# Altium PCB soldering_station_controls.PcbDoc
Units mil, origin at the board's own origin, x right, y up, seen from the top; angles counter-clockwise.
Board outline 1600 x 775 mil, 2 copper layers (Top Layer, Bottom Layer); 12 components, 8 nets, 41 pads, 0 vias.
Unrouted connection lines stored in the file: 22.
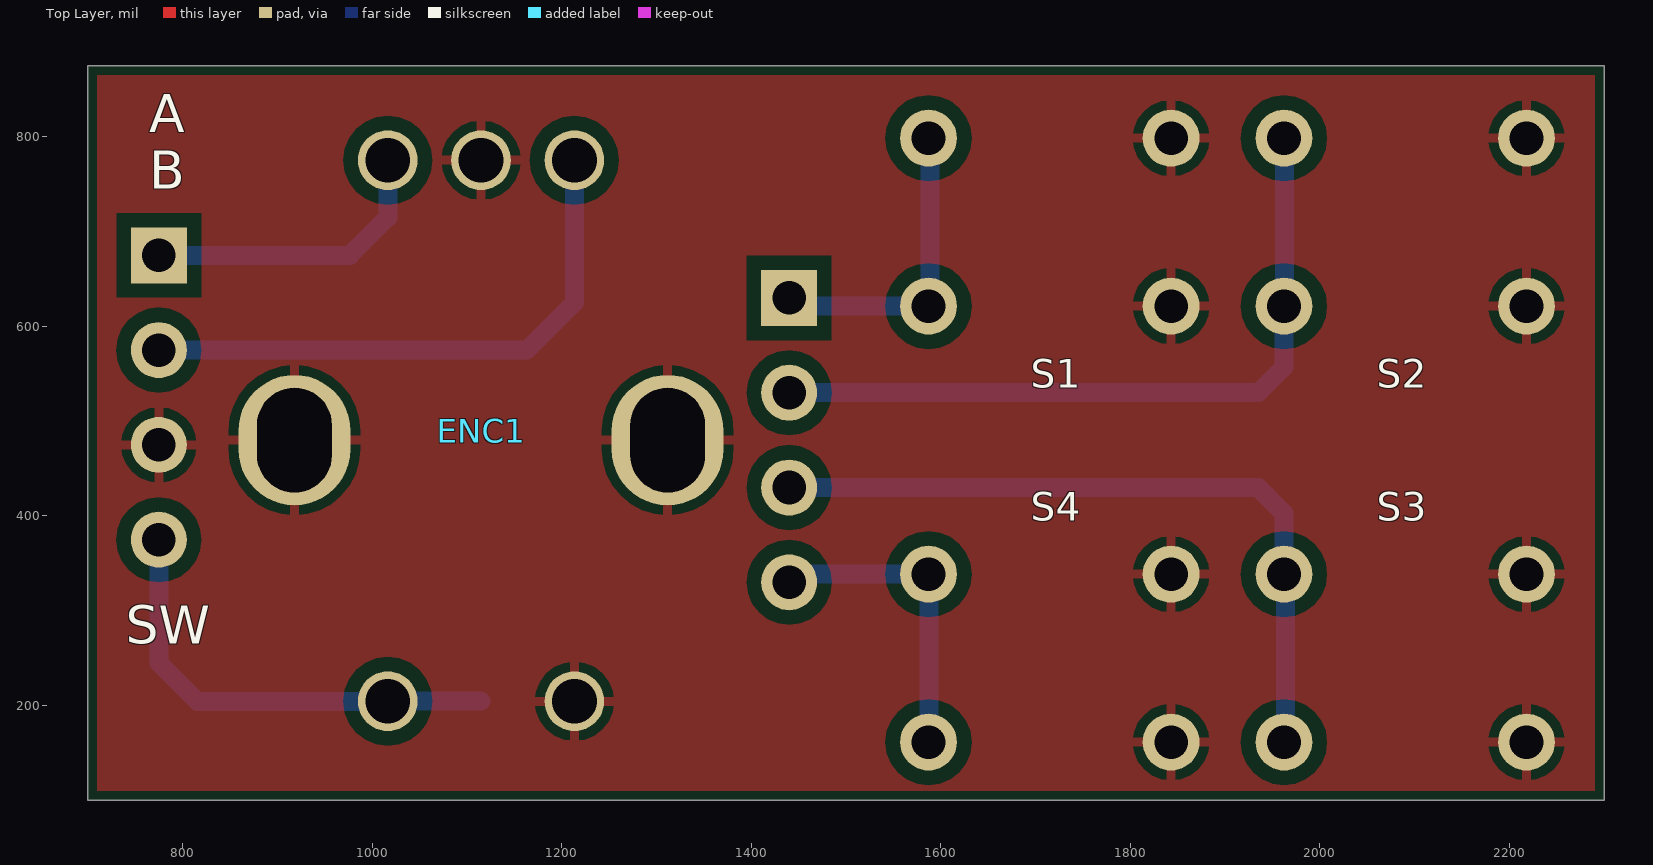
[diagram p0: Top Layer view]
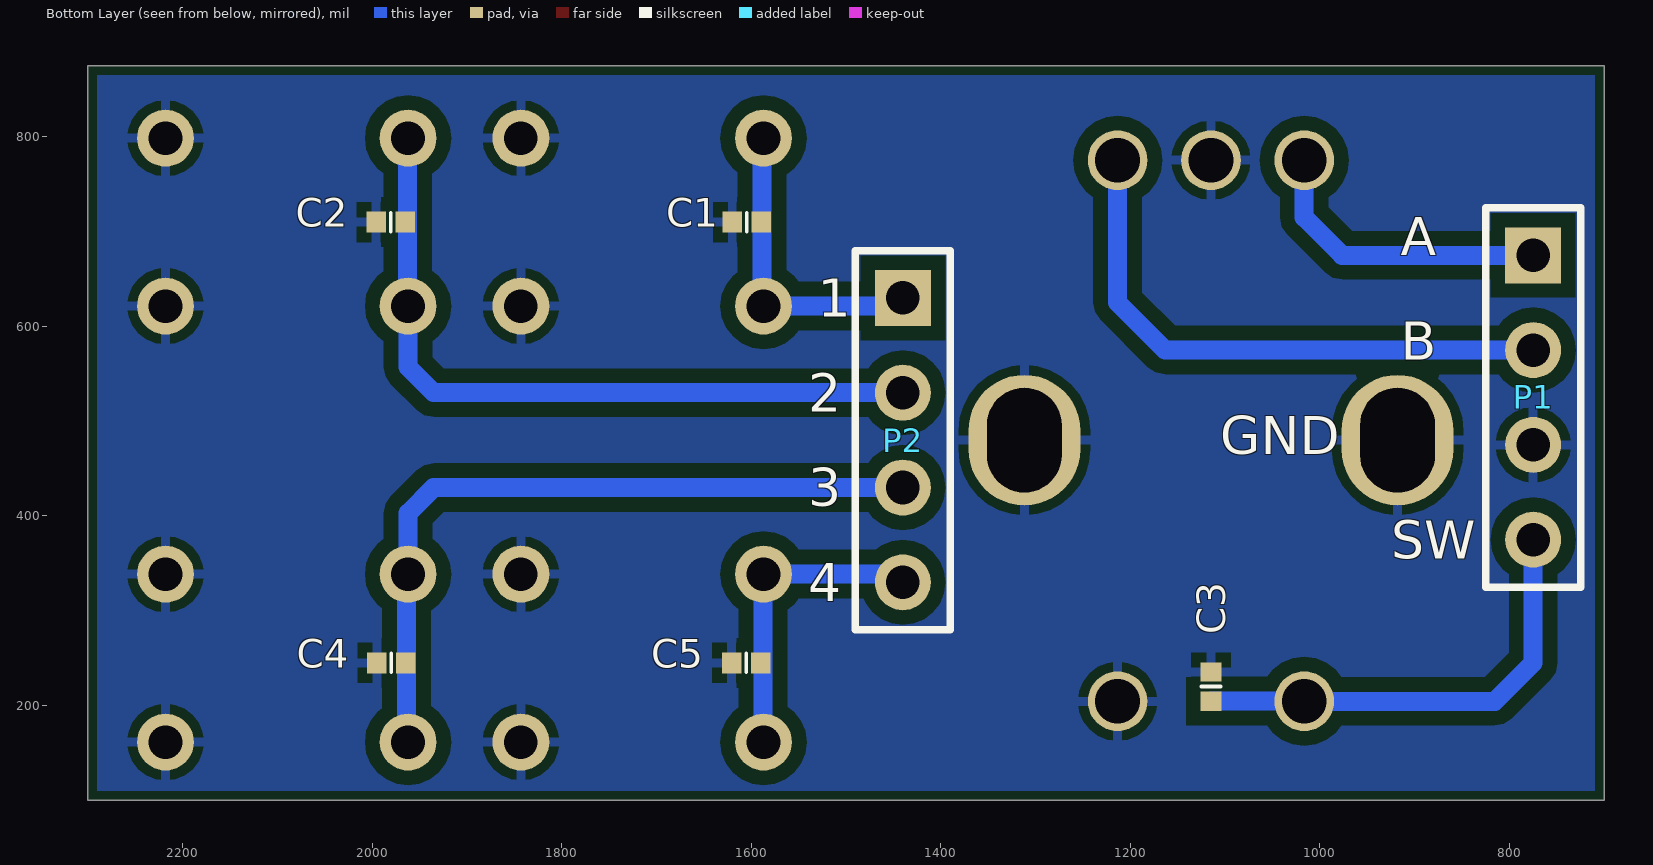
[diagram p1: Bottom Layer view, seen from below]
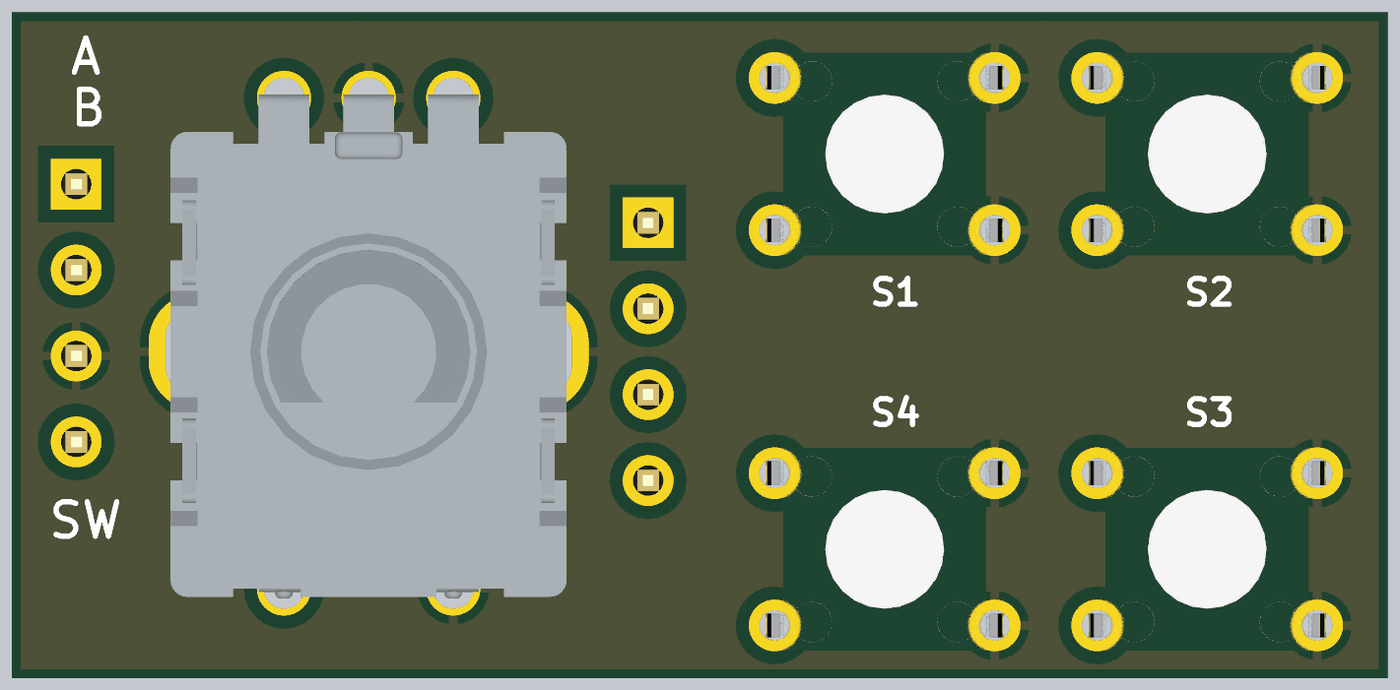
[diagram p2: 3D render of the assembled board from above, using the file's embedded part models]
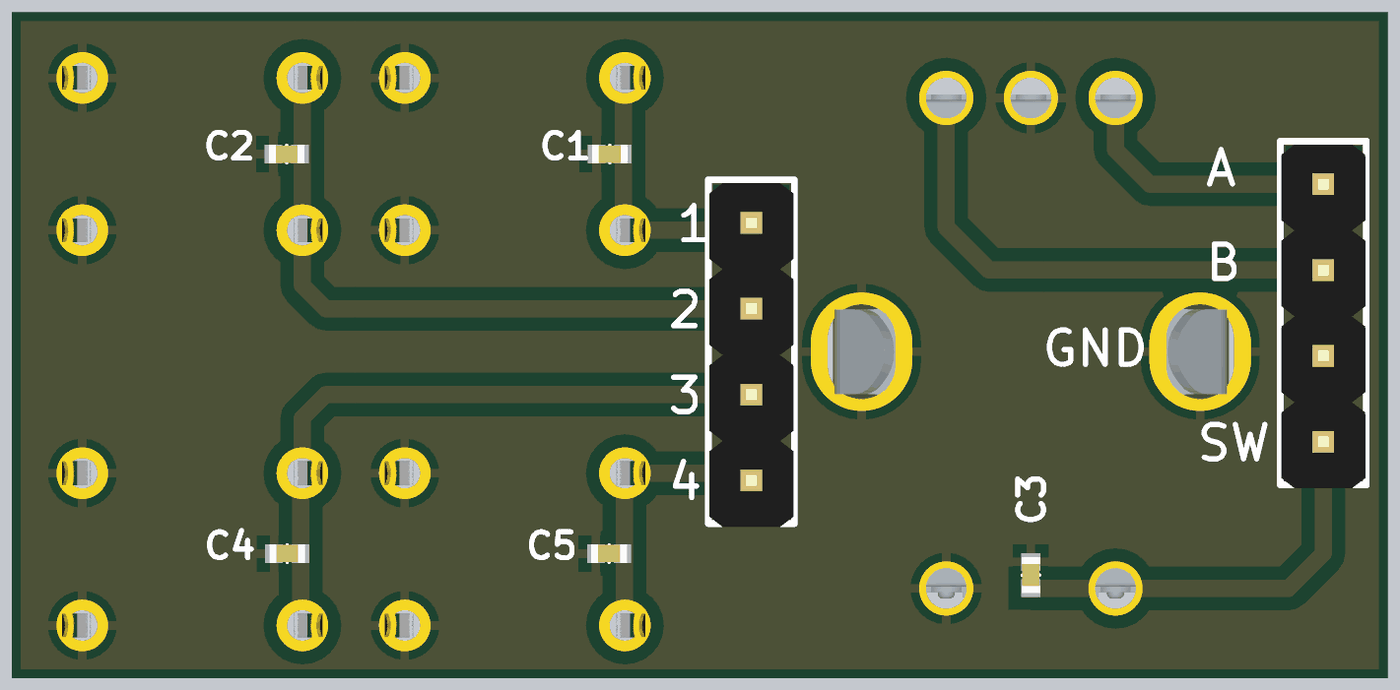
[diagram p3: 3D render of the assembled board from below, using the file's embedded part models]

## Layer stack, top to bottom
Top Solder: solder mask 0.4, Solder Resist, Dk 3.5
Top Layer: signal copper 1.4
Dielectric 1: dielectric 12.6, FR-4, Dk 4.8
Bottom Layer: signal copper 1.4
Bottom Solder: solder mask 0.4, Solder Resist, Dk 3.5

## Board outline
700,100 2300,100 2300,875 700,875

## Design rules (kind name [scope] priority, off if disabled: settings)
BoardOutlineClearance [All] p1: gap=10 ignorepadtopadclearanceinfootprint=FALSE
Clearance [All] p1: gap=6 ignorepadtopadclearanceinfootprint=TRUE except(15: Arc-Poly Track-Poly SMDPad-Poly THPad-Poly Via-Poly Fill-Poly Poly-Poly)
DiffPairsRouting [All] p1: maxlimit=10 minlimit=6 mostfreqgap=7 toplayer_minwidth=6 toplayer_maxwidth=15 toplayer_prefwidth=6 bottomlayer_minwidth=6 bottomlayer_maxwidth=15 bottomlayer_prefwidth=6 maxuncoupledlength=500
Height [All] p1: minheight=0 maxheight=1500 prefheight=500
HoleSize [All] p1: absolutevalues=TRUE maxlimit=248 minlimit=8 maxpercent=80.000 minpercent=20.000
MinimumSolderMaskSliver [All] p1: minsoldermaskwidth=1
PlaneConnect PlaneConnect_1 [All] p1: pad.planeconnectstyle=Relief pad.reliefexpansion=20 pad.reliefentries=4 pad.reliefconductorwidth=10 pad.reliefairgap=10 via.planeconnectstyle=Direct via.reliefexpansion=20 via.reliefentries=4 via.reliefconductorwidth=10 via.reliefairgap=10
PolygonConnect [All] p1: thpad.connectstyle=Relief thpad.reliefconductorwidth=10 thpad.reliefentries=4 thpad.polygonreliefangle="90 Angle" thpad.airgapwidth=10 smdpad.connectstyle=Relief smdpad.reliefconductorwidth=10 smdpad.reliefentries=4 smdpad.polygonreliefangle="90 Angle" smdpad.airgapwidth=10 via.connectstyle=Direct via.reliefconductorwidth=10 via.reliefentries=4 via.polygonreliefangle="90 Angle" via.airgapwidth=10
RoomDefinition U_TXS0102YZPR1 [InComponentClass('U_TXS0102YZPR1')] p1: confinementstyle=ConfineIn formatcopy=TRUE lockcomponents=FALSE outline 3080,4000 3295,4000 3295,4195 3080,4195
RoomDefinition U_TXS0102YZPR2 [InComponentClass('U_TXS0102YZPR2')] p2: confinementstyle=ConfineIn formatcopy=TRUE lockcomponents=FALSE outline 3509,4195 3294,4195 3294,4000 3509,4000
RoomDefinition Power [InComponentClass('Power')] p3: confinementstyle=ConfineIn formatcopy=TRUE lockcomponents=FALSE outline 1230,4448.54 1230,3623.54 1640,3623.54 1640,4448.54
RoomDefinition MCU [InComponentClass('MCU')] p4: confinementstyle=ConfineIn formatcopy=TRUE lockcomponents=FALSE outline 1722,3702 1722,3998 2369.29,3998 2369.29,4186.46 2388.35,4186.46 2388.35,4394.21 2454.02,4394.21 2454.02,4439.8 2875.98,4439.8 2875.98,4436.61 3285.98,4436.61 3285.98,4435.86 3706.3,4435.86 3706.3,4413.94 3823.94,4413.94 3823.94,4186.06 3053.94,4186.06 3053.94,3671.72 2826.06,3671.72 2826.06,3702
RoutingVias [All] p1: holewidth=12 width=24 viastyle="Through Hole" minholewidth=11.81 minwidth=24 maxholewidth=12 maxwidth=24
SilkToSolderMaskClearance SilkToSolderMaskClearance_C0402 [HasFootprint('C_0402_1005')] p1: minsilkscreentomaskgap=3 clearancetoexposedcopper=TRUE
SilkToSolderMaskClearance [IsPad] p2: minsilkscreentomaskgap=5 clearancetoexposedcopper=TRUE
SolderMaskExpansion [InPadClass('All Pads')] p1: expansion=3
Width [All] p1: maxlimit=50 minlimit=6 preferedwidth=15 minimp=50.000000 maximp=50.000000 favimp=50.000000
24 further rules are at their usual default settings.

## Components (designator, comment, footprint, x,y, rotation, side; value= is the part's Value field where it differs from the comment)
C1 "Ceramic X7R" C_0402_1005 1604.65,710 r0 bottom value=100nF
C2 "Ceramic X7R" C_0402_1005 1980.35,710 r0 bottom value=100nF
C3 "Ceramic X7R" C_0402_1005 1115,220 r90 bottom value=100nF
C4 "Ceramic X7R" C_0402_1005 1979.65,245 r0 bottom value=100nF
C5 "Ceramic X7R" C_0402_1005 1605.35,245 r0 bottom value=100nF
ENC1 "Wurth Elektronik 482016514001" ENCODER 1115,480 r0 top
P1 "ENC" P_HEADER_1x4_2.54 775,675 r270 bottom value=DS1021-1*4SF1-1
P2 "SW" P_HEADER_1x4_2.54 1440,630 r270 bottom value=DS1021-1*4SF1-1
S1 "TACT-613N-F" TACT-613N-F 1715,710 r90 top
S2 "TACT-613N-F" TACT-613N-F 2090,710 r90 top
S3 "TACT-613N-F" TACT-613N-F 2090,250 r90 top
S4 "TACT-613N-F" TACT-613N-F 1715,250 r90 top

## Footprints (in the part's own frame and the unit in brackets; to place one, negate y for a bottom-side part, rotate by r counter-clockwise, add the part's x,y. Pads: shape width x height; smd on the part's side, far side on the other; paste and mask are expansions set on the pad)
C_0402_1005 [mm]
  rect 0.52x0.56 smd: 1(-0.39,0) 2(0.39,0)
  silkscreen extent 0,-0.25 0,0.25, body extent -0.52,-0.27 0.53,0.28, height 0.55
ENCODER [mm] "rotary encoder"
  round 1.6 hole 1.2: 1(-2.5,7.5) 2(0,7.5) 3(2.5,7.5) 4(-2.5,-7) 5(2.5,-7)
  oval 3x3.5 hole 2.8 slot 2 at 0 deg: 6(-5,0) 7(5,0)
  body extent -5.85,-7.3 5.85,7.6, height 26.4
P_HEADER_1x4_2.54 [mm] "Connector; Header; 4 Position; Male"
  rect 1.5x1.5 hole 0.9: 1(0,0)
  round 1.5 hole 0.9: 2(2.54,0) 3(5.08,0) 4(7.62,0)
  silkscreen extent -1.27,-1.27 8.89,1.27, body extent -1.17,-1.25 8.99,1.25, height 8.2
TACT-613N-F [mm] "Mikroprze彻cznik TACT; SPST-NO; Pozycje: 2; 0,05A/12VDC"
  round 1.524 hole 0.9: 1(-2.25,3.25) 2(2.25,3.25) 3(-2.25,-3.25) 4(2.25,-3.25)
  body extent -3,-3.85 3,3.85, height 7

## Part data
C1 C2 C3 C4 C5: library part C_100nF_16V_X7R_0402_10, "Capacitor", Dielectric=X7R, Manufacturer=Murata, Manufacturer Part Number=GRM155R71C104KA88D, Tolerance (%)=10, Voltage=16V, HelpURL=https://www.mouser.com/ds/2/281/c02e-2905.pdf, Part Number=C_100nF_16V_X7R_0402_10, SCH_Footprint=0402, Supplier 1=TME, Supplier 2="RS Components", Supplier 3=Farnell, Supplier 4=Mouser, Supplier 5=Digi-Key, Supplier Part Number 4=81-GRM155R71C104KA88
ENC1: library part ENCODER
P1 P2: library part P_HEADER_1x4_2.54, "Header, 4-Pin", Manufacturer=Connfly, Manufacturer Part Number=DS1021-1*4SF1-1, Supplier Part Number 1=ZL201-04G, Component Type=Standard, HelpURL=http://datasheet.octopart.com/DS1021-1%2A4SF1-1-Connfly-datasheet-65537859.pdf, Part Number=P_HEADER_1x4_2.54, SCH_Footprint="1x4 2.54mm", Supplier 1=TME, Supplier 2="RS Components", Supplier 3=Farnell, Supplier 4=Mouser, Supplier 5=Digi-Key

## Nets (pads, with @x,y where several pads share a name; then routed paths per layer and width w, separated by ;. In a path a pad name is that pad's centre, name@x,y a point inside that pad or via, vN(x,y) a via of type N, cw(c..) or ccw(c..) an arc to the next point about the centre after c; other vN are vias at no path point)
A: ENC1.1 P1.1 | length 318.4
  Bottom Layer w20: P1.1 976.57,675 1016.57,715 ENC1.1
B: ENC1.3 P1.2 | length 609.4
  Bottom Layer w20: P1.2 1163.43,575 1213.43,625 ENC1.3
GND: C1.2 C2.2 C3.2 C4.2 C5.2 ENC1.2 ENC1.5 ENC1.6 ENC1.7 P1.3 S1.3 S1.4 S2.3 S2.4 S3.3 S3.4 S4.3 S4.4
SW: C3.1 ENC1.4 P1.4 | length 486.9
  Bottom Layer w20: P1.4 775,245 815.59,204.41 ENC1.4 1016.81,204.65 C3.1
SW1: C1.1 P2.1 S1.1 S1.2 | length 312.8
  Bottom Layer w20: P2.1@1455,630 1463.58,621.42 S1.1 ; S1.1@1588.74,621.42 S1.2@1588.74,798.58
SW2: C2.1 P2.2 S2.1 S2.2 | length 759.8
  Bottom Layer w20: P2.2@1455,530 1935,530 1962.05,557.05 S2.1 ; S2.1@1962.4,626.42 S2.2@1962.4,803.58
SW3: C4.1 P2.3 S3.1 S3.2 | length 759.8
  Bottom Layer w20: P2.3@1455,430 1935,430 1962.05,402.95 S3.2 ; S3.1@1963.74,156.42 S3.2@1963.74,333.58
SW4: C5.1 P2.4 S4.1 S4.2 | length 312.8
  Bottom Layer w20: P2.4@1455,330 1463.58,338.58 S4.2 ; S4.1@1587.4,161.42 S4.2@1587.4,338.58

## Polygon pours and split planes (outlines as drawn)
no net on Top Layer (solid, remove dead copper, pour order 2): 2360,940
GND on Top Layer (solid, remove dead copper, pour order 0): 700,875 700,100 2300,100 2300,875
GND on Bottom Layer (solid, remove dead copper, pour order 4): 700,875 700,100 2300,100 2300,875

## Silkscreen, mask and mechanical layers (free items; w line width, h text height)
Top Overlay:
  text "A" at 765,805 h40
  text "B" at 765,745 h40
  text "SW" at 740,265 h40
Bottom Overlay:
  text "A" at 915,675 h40
  text "1" at 1530,610 h40
  text "B" at 915,565 h40
  text "2" at 1540,510 h40
  text "GND" at 1105,465 h40
  text "3" at 1540,410 h40
  text "SW" at 925,355 h40
  text "4" at 1540,310 h40

## Dimensions
2300,875 to 2300,100 on Mechanical 1
700,875 to 2300,875 on Mechanical 1

## Text inside footprints (layer, text, board x,y; h text height)
C1: Mechanical 17 "d" at 1575.65,712 h30 r180; Mechanical 19 "-" at 1575.65,712 h30 r180
C2: Mechanical 17 "d" at 1951.35,712 h30 r180; Mechanical 19 "-" at 1951.35,712 h30 r180
C3: Mechanical 17 "d" at 1113,191 h30 r270; Mechanical 19 "-" at 1113,191 h30 r270
C4: Mechanical 17 "d" at 1950.65,247 h30 r180; Mechanical 19 "-" at 1950.65,247 h30 r180
C5: Mechanical 17 "d" at 1576.35,247 h30 r180; Mechanical 19 "-" at 1576.35,247 h30 r180
P1: Mechanical 17 "d" at 805,710 h60 r90; Mechanical 19 "-" at 805,710 h60 r90
P2: Mechanical 17 "d" at 1470,665 h60 r90; Mechanical 19 "-" at 1470,665 h60 r90